# Altium PCB PCB2.PcbDoc
Units mm, origin at the board's own origin, x right, y up, seen from the top; angles counter-clockwise.
Board outline 6.22 x 34.07 mm, 4 copper layers (Top Layer, Int1 (GND), Int2 (PWR), Bottom Layer), stack 1.57 mm thick; 11 components, 6 nets, 29 pads, 9 vias.
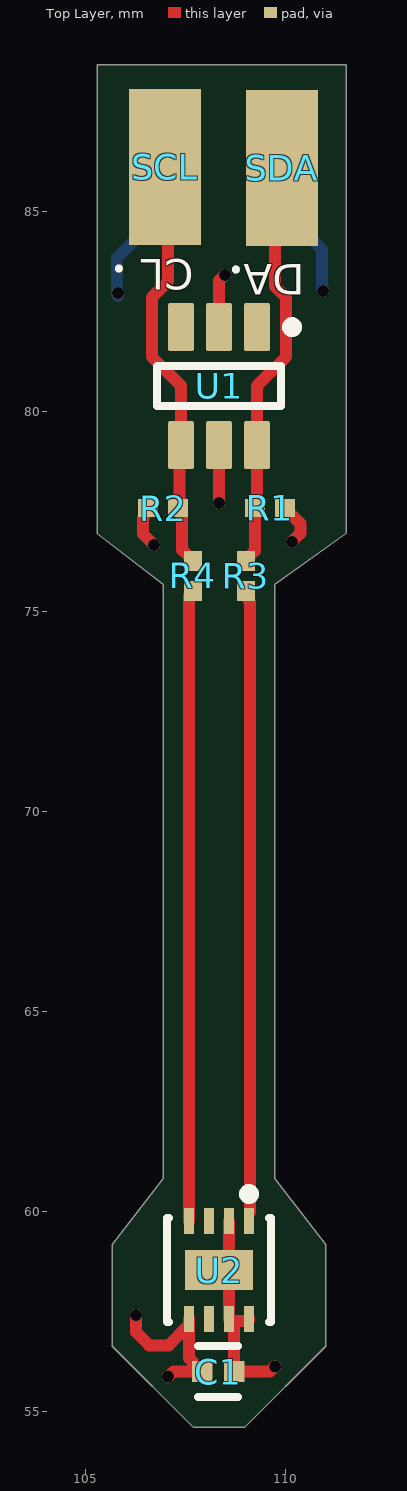
[diagram p0: Top Layer view]
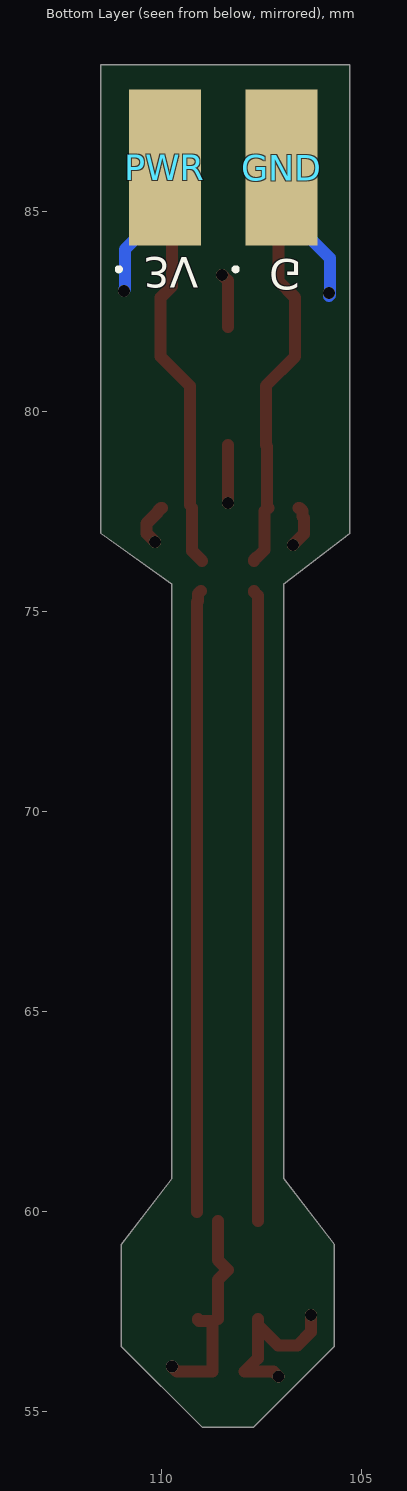
[diagram p1: Bottom Layer view, seen from below]
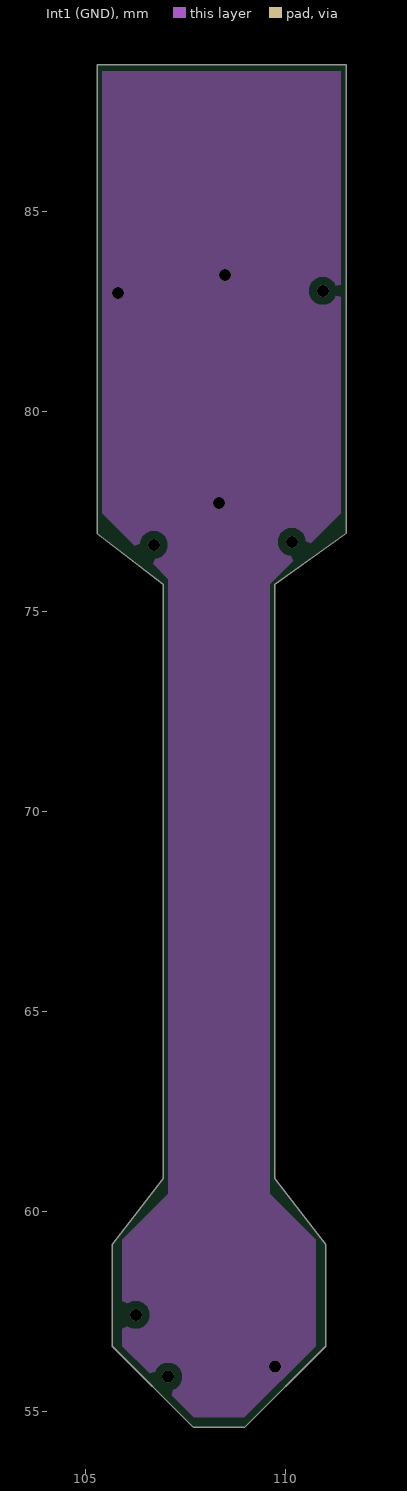
[diagram p2: Int1 (GND)]
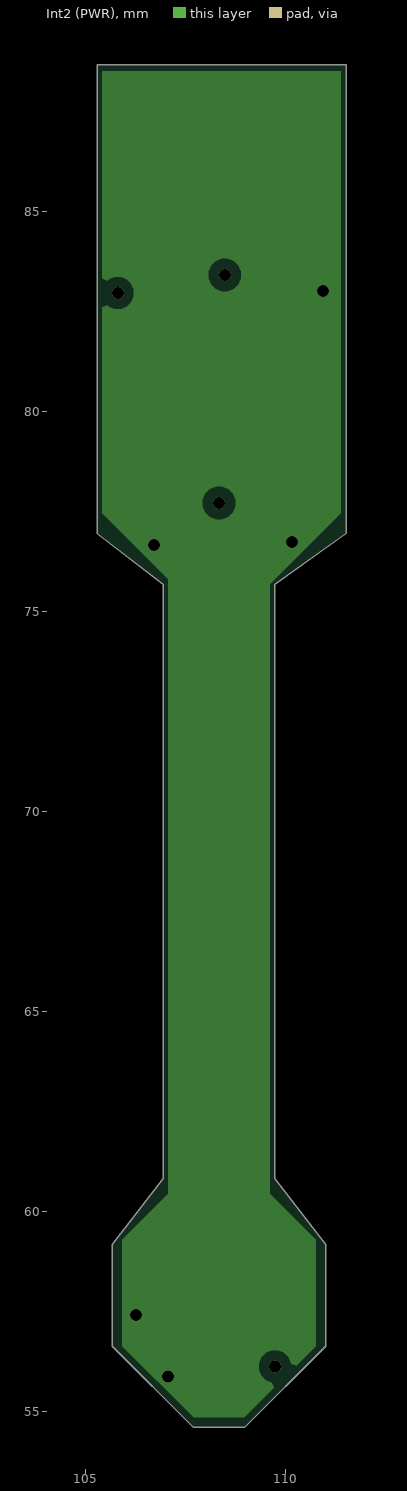
[diagram p3: Int2 (PWR)]

## Layer stack, top to bottom
Top Solder: solder mask 0.0254, SM-001, Dk 4
Top Layer: signal copper 0.035
Dielectric 1: prepreg 0.2, PP-017, Dk 4.6
Int1 (GND): signal copper 0.0175
Dielectric 3: core 1.065, Core-039, Dk 4.6
Int2 (PWR): signal copper 0.0175
Dielectric 5: prepreg 0.2, PP-017, Dk 4.6
Bottom Layer: signal copper 0.035
Bottom Solder: solder mask 0.0254, SM-001, Dk 4

## Board outline
105.664,56.642 105.664,59.182 106.934,60.833 106.934,75.692 105.283,76.962 105.288,76.962 105.288,88.678 111.506,88.678 111.506,76.962 109.728,75.692 109.728,60.833 110.998,59.182 110.998,56.642 108.966,54.61 107.696,54.61

## Design rules (kind name [scope] priority, off if disabled: settings)
Clearance [All] p1: gap=0.2 ignorepadtopadclearanceinfootprint=FALSE except(0: Arc-Hole Track-Hole SMDPad-Hole THPad-Hole Via-Hole Fill-Hole Poly-Hole Region-Hole Text-Hole; 0.1: Arc-Arc Arc-Track Arc-SMDPad Track-Track Track-SMDPad; 0.127: SMDPad-SMDPad; 0.254: Arc-Text Track-Text THPad-Fill THPad-Poly THPad-Region THPad-Text Text-Text)
ComponentClearance [All] p1: gap=0.1 collisioncheckmode=3 verticalgap=0 showdistances=TRUE
MinimumSolderMaskSliver [All] p1: minsoldermaskwidth=0.08
PolygonConnect [All] p1: connectstyle=Direct reliefconductorwidth=0.254 reliefentries=4 polygonreliefangle="90 Angle" airgapwidth=0.254
RoutingVias [All] p1: holewidth=0.711 width=1.27 viastyle="Through Hole" minholewidth=0.711 minwidth=1.27 maxholewidth=0.711 maxwidth=1.27
SMDToCorner [All] p1: distance=0
SilkToSolderMaskClearance [IsPad] p1: minsilkscreentomaskgap=0.08 clearancetoexposedcopper=TRUE
SolderMaskExpansion [All] p1: expansion=0.102 istentingtop=FALSE
UnRoutedNet [All] p1: checkbadconnections=TRUE
Width [All] p1: maxlimit=0.5 minlimit=0.2 preferedwidth=0.3 midlayer1_minwidth=0.254 midlayer2_minwidth=0.254 minimp=50.000000 maximp=50.000000 favimp=50.000000
26 further rules are at their usual default settings.

## Components (designator, comment, footprint, x,y, rotation, side; value= is the part's Value field where it differs from the comment)
C1 "100nF" FP-C0402-BB-MFG 108.312,56.007 r0 top value="0.10 μF"
GND "Solder pad" pad 106.986,86.106 r90 bottom
PWR "Solder pad" pad 109.907,86.106 r90 bottom
R1 "10k" RESC1005X40X25LL05T10 109.601,77.597 r0 top
R2 "10k" RESC1005X40X25LL05T10 106.934,77.597 r180 top
R3 "27" RESC1005X40X25LL05T10 109,75.9 r270 top
R4 "27" RESC1005X40X25LL05T10 107.675,75.9 r270 top
SCL "Solder pad" pad 106.975,86.125 r90 top
SDA "Solder pad" pad 109.9,86.1 r90 top
U1 "SN65220DBVR" DBV0006A_M 108.331,80.645 r270 top
U2 "SHT31-DIS-B2.5KS" FP-SHT31-DIS-B2_5KS-MFG 108.331,58.547 r270 top

## Footprints (in the part's own frame and the unit in brackets; to place one, negate y for a bottom-side part, rotate by r counter-clockwise, add the part's x,y. Pads: shape width x height; smd on the part's side, far side on the other; paste and mask are expansions set on the pad)
DBV0006A_M [mm] "SOT23, 6-Leads, Body 3.05x1.75mm, Pitch 0.95mm, IPC Low Density"
  rrect15% 1.2x0.65 smd: 1(-1.475,0.95) 2(-1.475,0) 3(-1.475,-0.95) 4(1.475,-0.95) 5(1.475,0) 6(1.475,0.95)
  silkscreen extent -1.6,-1.55 0.5,1.95, body extent -1.42,-1.46 1.42,1.46, height 1.11
FP-C0402-BB-MFG [mm]
  rect 0.52x0.52 smd paste+0 mask+0: 1(-0.4,0) 2(0.4,0)
  silkscreen extent -0.5,-0.64 0.5,0.64, body extent -0.8,-0.4 0.8,0.4, height 0.25
FP-SHT31-DIS-B2_5KS-MFG [mm]
  rect 0.65x0.25 smd paste-1000 mask+0: 1(-1.225,0.75) 2(-1.225,0.25) 3(-1.225,-0.25) 4(-1.225,-0.75) 5(1.225,-0.75) 6(1.225,-0.25) 7(1.225,0.25) 8(1.225,0.75)
  rect 1x1.7 smd paste-1000 mask+0: 9(0,0)
  silkscreen extent -2.02,-1.3 1.3,1.3, body extent -1.65,-1.4 1.65,1.4, height 0.25
pad [mm] "solder pad"
  rect 3.9x1.8 smd: 1(0,0)
  silkscreen extent -2.59,1.1 -2.49,1.2
RESC1005X40X25LL05T10 [mm] "Chip Resistor, 2-Leads, Body 1.00x0.50mm, IPC High Density"
  rect 0.5x0.45 smd: 1(-0.375,0) 2(0.375,0)
  body extent -0.53,-0.27 0.53,0.28, height 0.4

## Part data
C1: library part CMP-2008-02046-2, "CAP CER 0.1UF 10V X5R 0402", Capacitance="0.10 μF", Manufacturer=Kemet, Manufacturer Part Number=C0402C104K8PACTU, Package=C0402-BB, Temperature="-55°C to +125°C", Temperature Characteristic=X5R, Temperature Coefficient=15%, Temperature Range High=+125°C, Temperature Range Low=-55°C, Tolerance=0.1, Voltage Rating="10 V", Automotive=No, Category=Cap, ComponentLink2Description=Datasheet, ComponentLink2URL=https://content.kemet.com/datasheets/KEM_C1002_X7R_SMD.pdf, Device Class L1="Passive Components", Device Class L2=Capacitors, Device Class L3="Ceramic Capacitors", Digikey Description="CAP CER 0.1UF 10V X5R 0402", Height=0.55mm, Ipc Land Pattern Name=CAPC10050X50, Lead Free=Yes, Material=Ceramic, Mouser Description="Capacitor 100 nF 10 VDC 0402", Octopart=https://octopart.com/c0402c104k8pactu-kemet-140039, RoHS=TRUE
GND PWR SCL SDA: library part pad
R1 R2: library part CMP-2002-01790-3, "RES 10kΩ ±1% 0.063W 0402", Manufacturer="Yageo / Phycomp", Part Number=RC0402FR-0710KL
R3 R4: library part CMP-2002-01790-3, "RES 10kΩ ±1% 0.063W 0402", Manufacturer="Yageo / Phycomp", Part Number=RC0402FR-0727RL
U1: library part CMP-0326-00064-3, "Single Universal Serial Bus Port Transient Suppressor, 2 Channels, -40 to +85 degC, 6-pin SOT-23 (DBV), Green (RoHS & no Sb/Br)", Breakdown Voltage(Min)(V)=7, IO Capacitance(Typ)(pF)=35, IO Leakage Current(nA)=1000, Manufacturer="Texas Instruments", ComponentLink1Description="Manufacturer URL", ComponentLink1URL=http://www.ti.com/, ComponentLink2Description=Datasheet, ComponentLink2URL=http://www.ti.com/general/docs/lit/getliterature.tsp?genericPartNumber=SN65220&fileType=pdf, ComponentLink3Description="URL Link1", ComponentLink3URL=SamplesURL:http://www.ti.com/product/sn65220#samples, DatasheetVersion=SLLS266G, Eco-Plan="Green (RoHS & no Sb/Br)", Mounting Technology="Surface Mount", PackageDescription="6-Pin Plastic Small-Outline Package, 2.9 x 1.6 mm Body, 0.95 mm Pitch, 2.8 mm Lead Span", PackageReference=DBV0006A, PackageVersion="revK, Mar-2006", PartNumber=SN65220DBVR, SubFamily="ESD Solution", USB Full Speed=TRUE
U2: library part CMP-144040-000009-1, "SENSOR HUMID/TEMP 5V I2C 2% SMD", RoHS Compliant=Yes

## Via types
v1: diameter 0.3, hole 0.3, Top Layer to Bottom Layer, 9 vias

## Nets (pads, with @x,y where several pads share a name; then routed paths per layer and width w, separated by ;. In a path a pad name is that pad's centre, name@x,y a point inside that pad or via, vN(x,y) a via of type N, cw(c..) or ccw(c..) an arc to the next point about the centre after c; other vN are vias at no path point)
+3: C1.1 PWR.1 R1.2 R2.2 U2.5 | length 10.2
  Top Layer w0.3: v1(106.25,57.425) 106.25,57 106.584,56.666 107.075,56.666 U2.5@107.581,57.172 ; R2.2 106.534,77.597 106.459,77.522 106.459,77.38 106.425,77.346 106.425,76.95 v1(106.7,76.675) ; v1(107.061,55.88) 107.188,56.007 C1.1 107.581,56.338 U2.5@107.581,57.172 ; U2.5 107.581,57.302 U2.5@107.581,57.172 ; R1.2 110.001,77.597 110.076,77.522 110.076,77.497 110.362,77.211 110.362,76.962 v1(110.15,76.75)
  Bottom Layer w0.3: PWR.1 109.907,85.182 109.85,85.125 109.85,85.113 110.9,84.063 110.9,83.075 v1@110.925,83.05
  other v1: 110.925,83.025
GND: C1.2 GND.1 U1.2 U1.5 U2.2 U2.7 U2.8 U2.9 | length 11.9
  Top Layer w0.3: v1(108.331,77.724) U1.5 ; U1.2 108.331,83.281 v1(108.475,83.425) ; U2.7 108.581,58.297 U2.9 108.581,58.797 U2.2 ; U2.8 109.081,57.302 109.056,57.277 108.712,57.277 C1.2 109.601,56.007 v1(109.728,56.134)
  Bottom Layer w0.3: v1@105.8,82.9 105.775,82.925 105.775,83.845 106.986,85.056 GND.1
  other v1: 105.8,82.975
SCL: R4.2 U2.4 | length 15.8
  Top Layer w0.3: U2.4 107.581,75.406 107.675,75.5 R4.2
SCL_PAD: R2.1 R4.1 SCL.1 U1.4 | length 10.5
  Top Layer w0.3: SCL.1@106.975,86.05 107.061,85.964 107.061,83.268 106.652,82.859 106.652,81.381 107.381,80.652 U1.4 107.345,79.134 107.345,77.633 R2.1 107.334,77.597 107.409,77.522 107.409,76.551 107.585,76.375 107.6,76.375 107.675,76.3 R4.1
SDA: R3.2 U2.1 | length 15.6
  Top Layer w0.3: R3.2 109.075,75.45 109.075,75.274 109.1,75.249 U2.1@109.1,60
SDA_PAD: R1.1 R3.1 SDA.1 U1.6 | length 10.3
  Top Layer w0.3: R3.1@108.975,76.275 109.226,76.526 R1.1 ; R1.1@109.281,77.672 U1.6 109.281,80.652 110.01,81.381 110.01,82.859 109.725,83.144 109.725,85.925 SDA.1
pads on no net: U1.1 U1.3 U2.3 U2.6

## Polygon pours and split planes (outlines as drawn)
+3 on Int2 (PWR) "+3_L03_P001" (solid, pour order 1): 105.41,88.519 111.379,88.519 111.379,77.47 109.601,75.692 109.601,60.452 110.744,59.309 110.744,56.642 108.966,54.864 107.696,54.864 105.918,56.642 105.918,59.309 107.061,60.452 107.061,75.819 105.41,77.47
GND on Int1 (GND) "GND_L02_P000" (solid, pour order 0): 105.41,88.519 111.379,88.519 111.379,77.47 109.601,75.692 109.601,60.452 110.744,59.309 110.744,56.642 108.966,54.864 107.696,54.864 105.918,56.642 105.918,59.309 107.061,60.452 107.061,75.819 105.41,77.47

## Other copper
Bottom Layer:

## Silkscreen, mask and mechanical layers (free items; w line width, h text height)
Top Overlay:
  text "CL" at 107.697,83.822 h0.76 r180
  text "DA" at 110.472,83.697 h0.76 r180
Bottom Overlay:
  text "3V" at 110.447,83.872 h0.76 r180
  text "G" at 107.297,83.822 h0.76 r180
Mechanical 1:
  lines w0.154: 105.283,77.851 105.283,76.962 106.934,75.692 ; 105.288,76.962 105.288,88.678 111.506,88.678 111.506,76.962 ; 106.934,75.057 106.934,75.692 ; 109.728,75.184 109.728,75.692 ; 111.506,77.724 111.506,76.962 ; 106.934,75.692 106.934,60.833 105.664,59.182 105.664,56.642 107.696,54.61 108.331,54.61 108.966,54.61 110.998,56.642 110.998,59.182 109.728,60.833 109.728,68.58 109.728,75.692 ; 109.728,75.692 111.506,76.962